# Altium PCB LEDBoard.PcbDoc
Units mil, origin at the board's own origin, x right, y up, seen from the top; angles counter-clockwise.
Board outline 3149.61 x 3149.61 mil, 4 copper layers (Top Layer, PWR, GND, Bottom Layer), stack 23.756 mil thick; 65 components, 34 nets, 164 pads, 125 vias.
Unrouted connection lines stored in the file: 4.
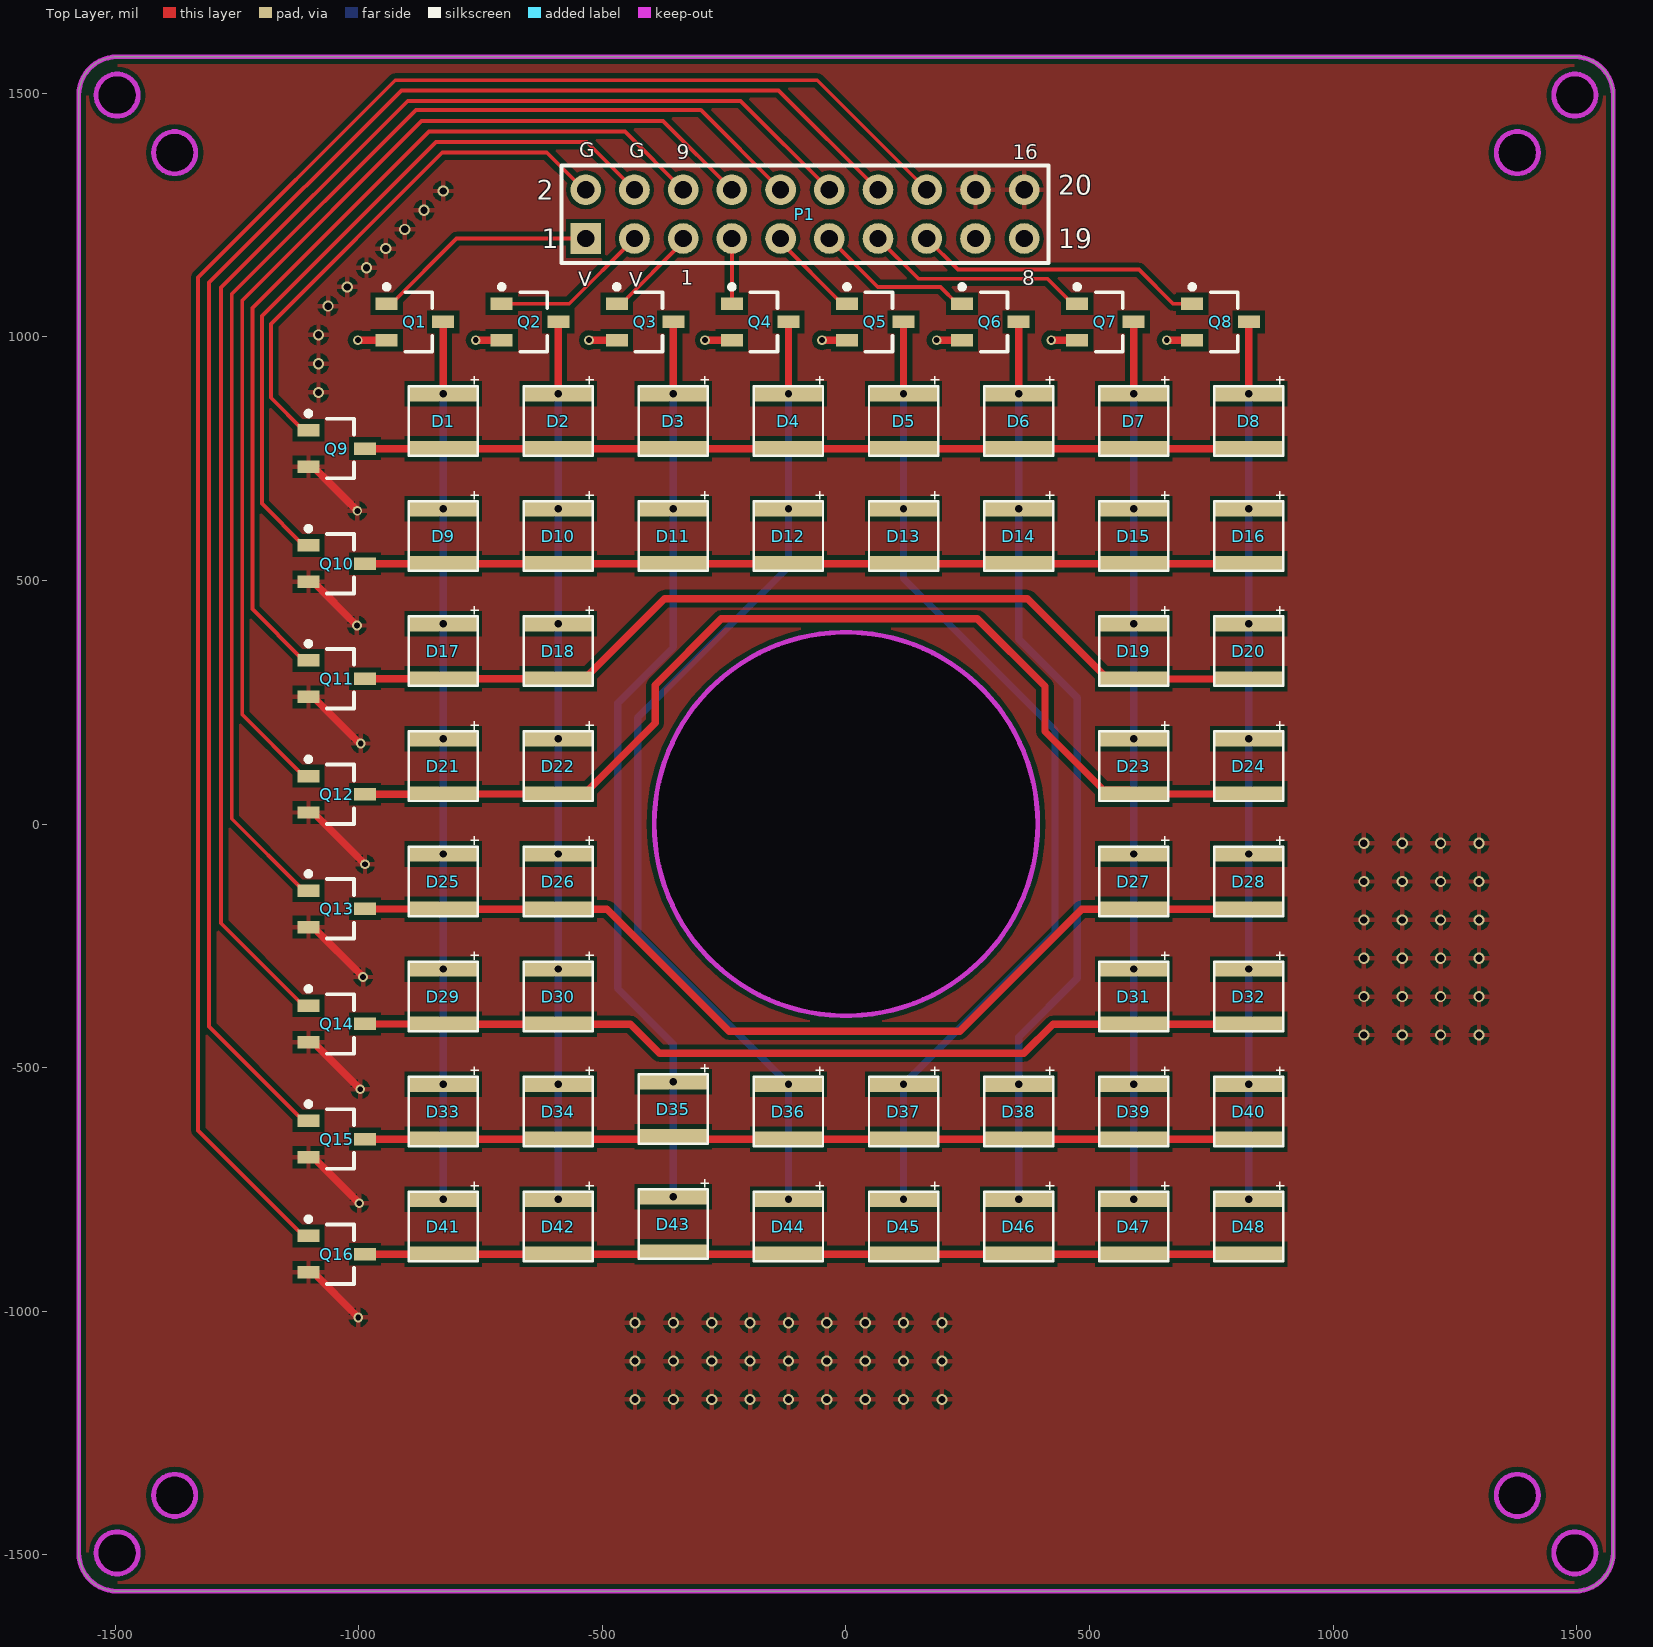
[diagram p0: Top Layer view]
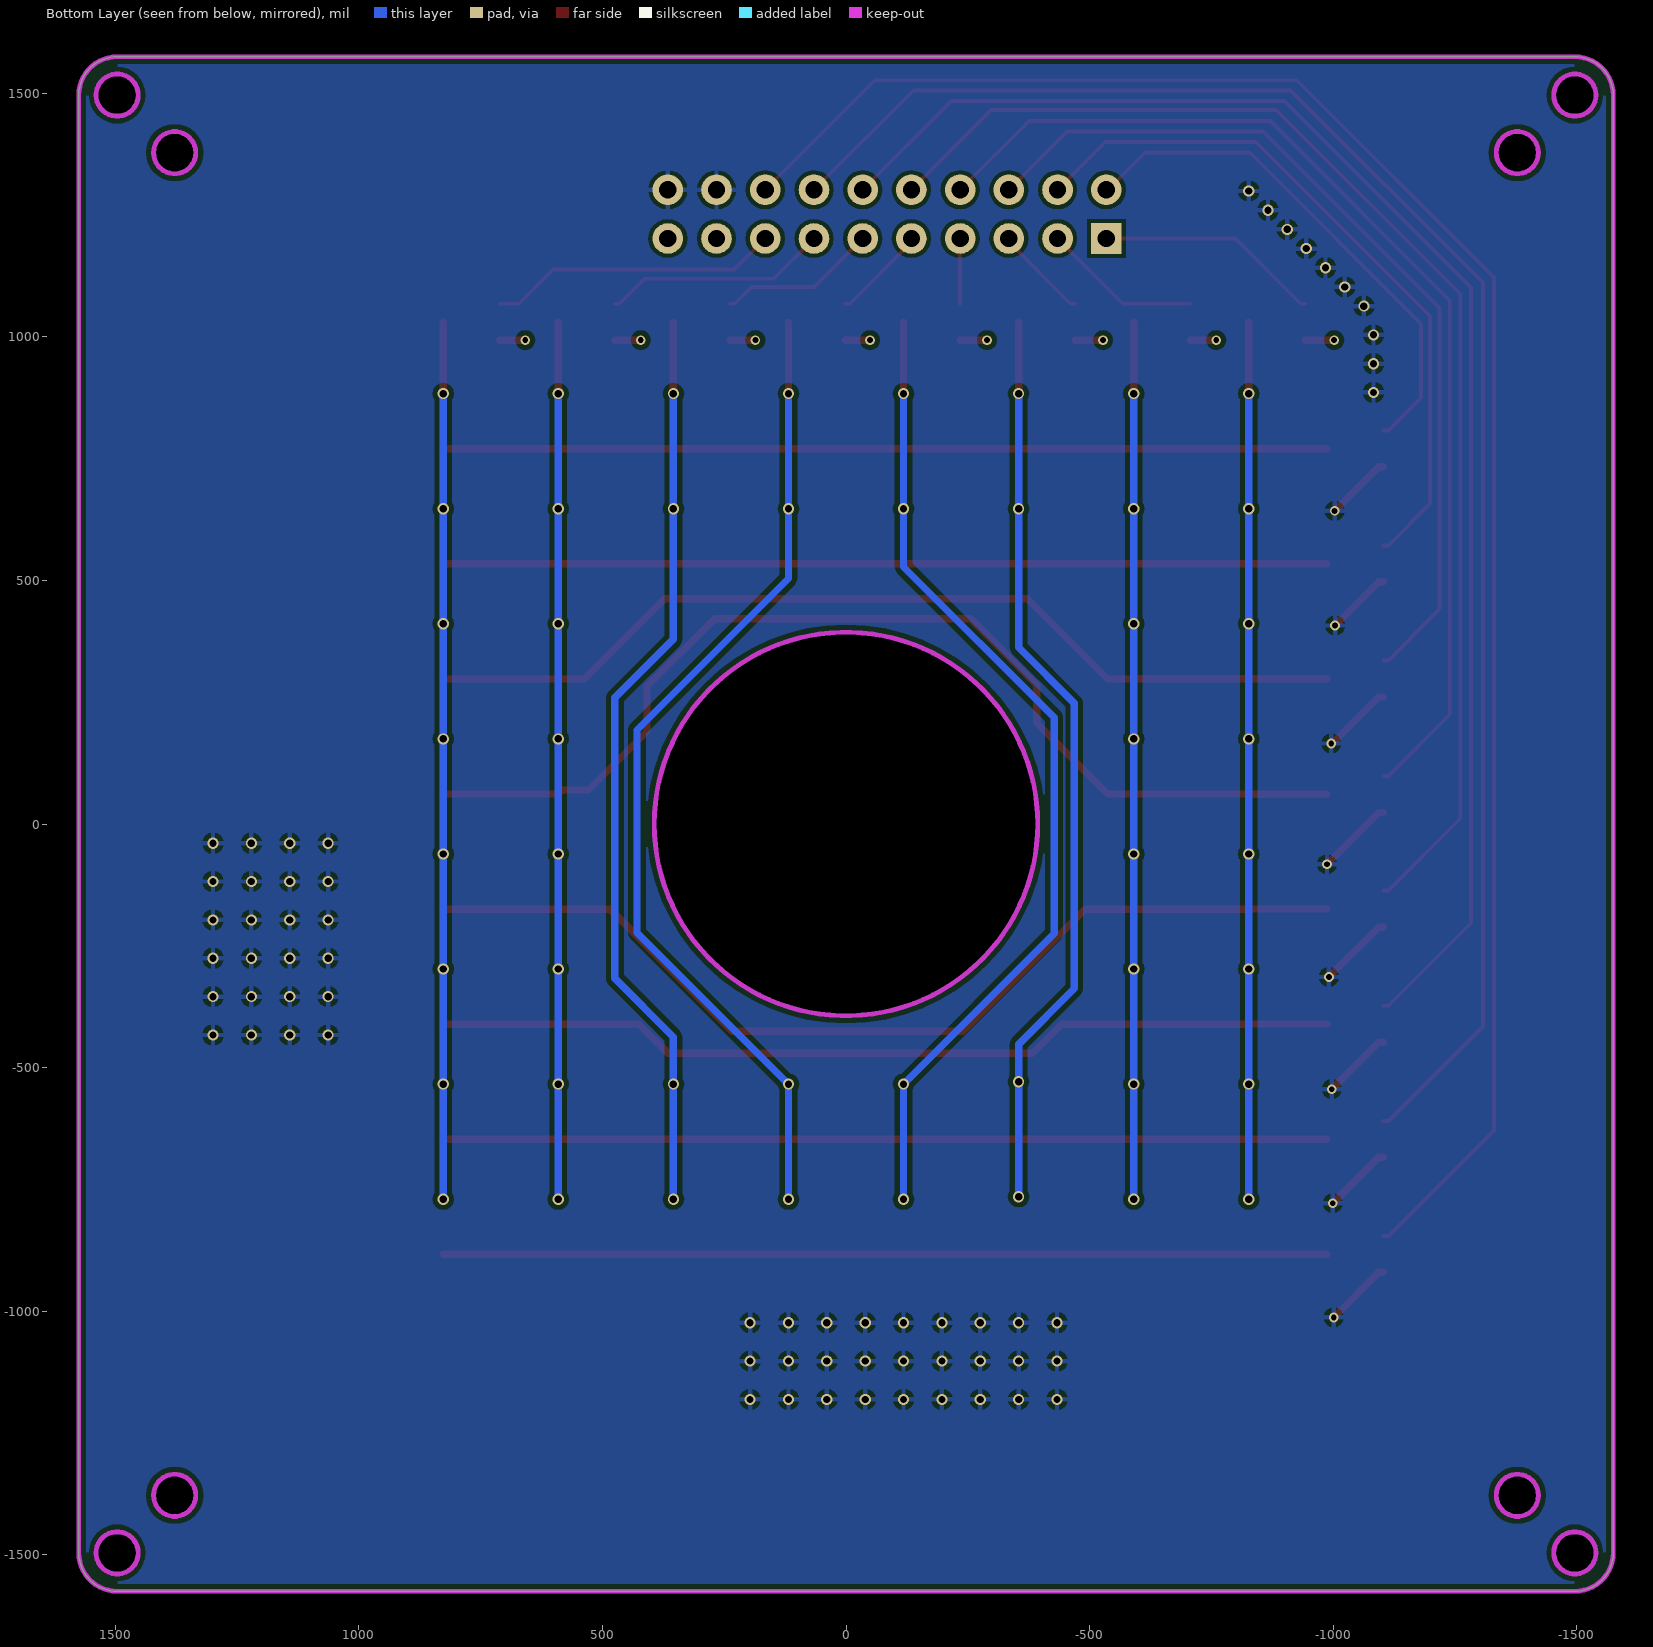
[diagram p1: Bottom Layer view, seen from below]
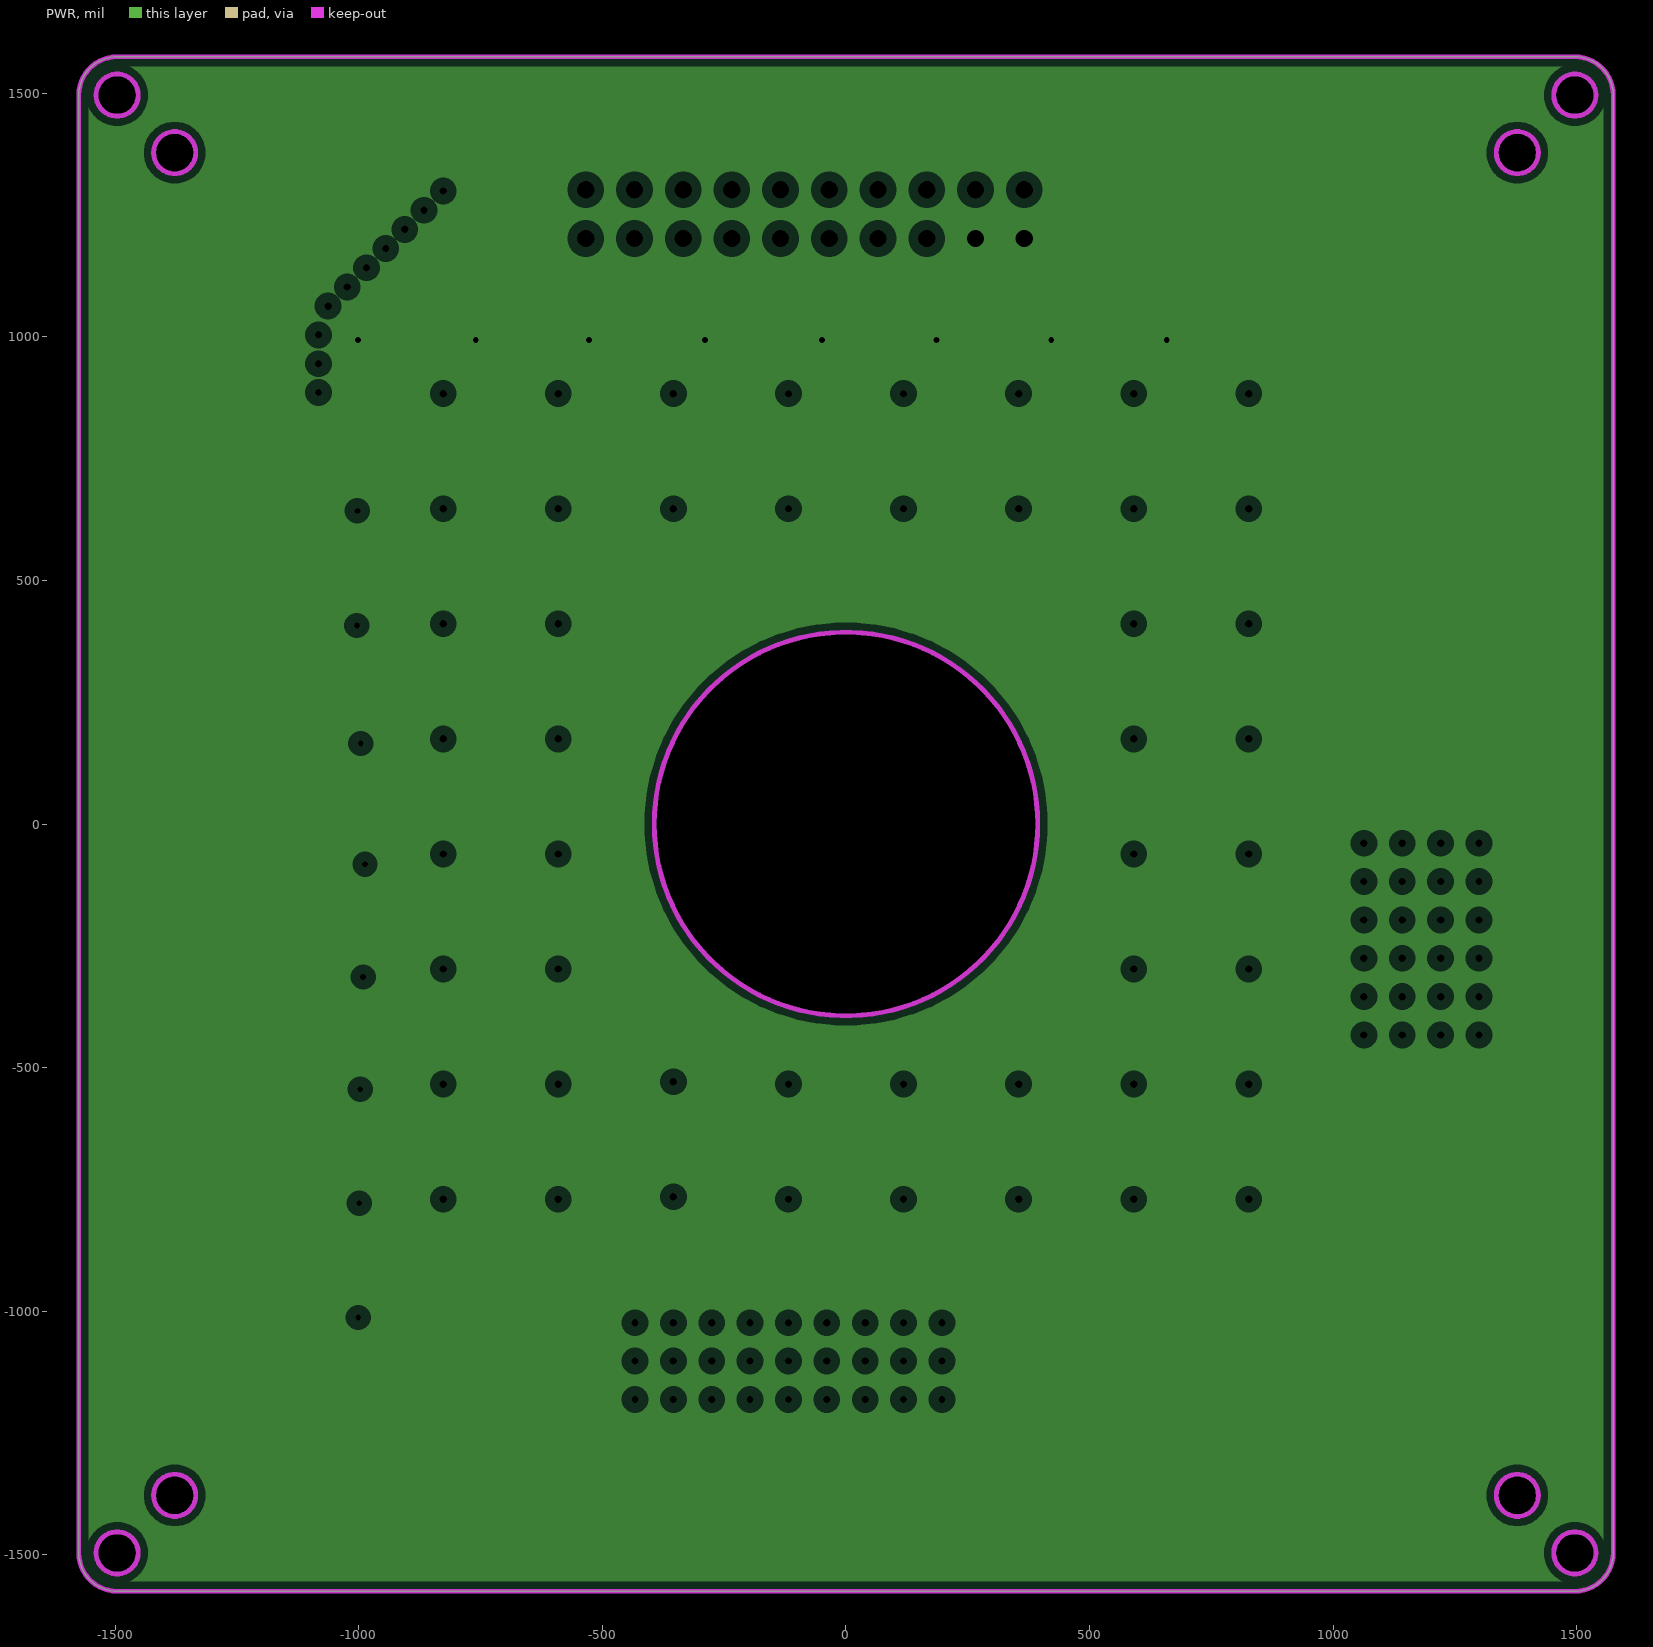
[diagram p2: PWR, clearances drawn from the general rule]
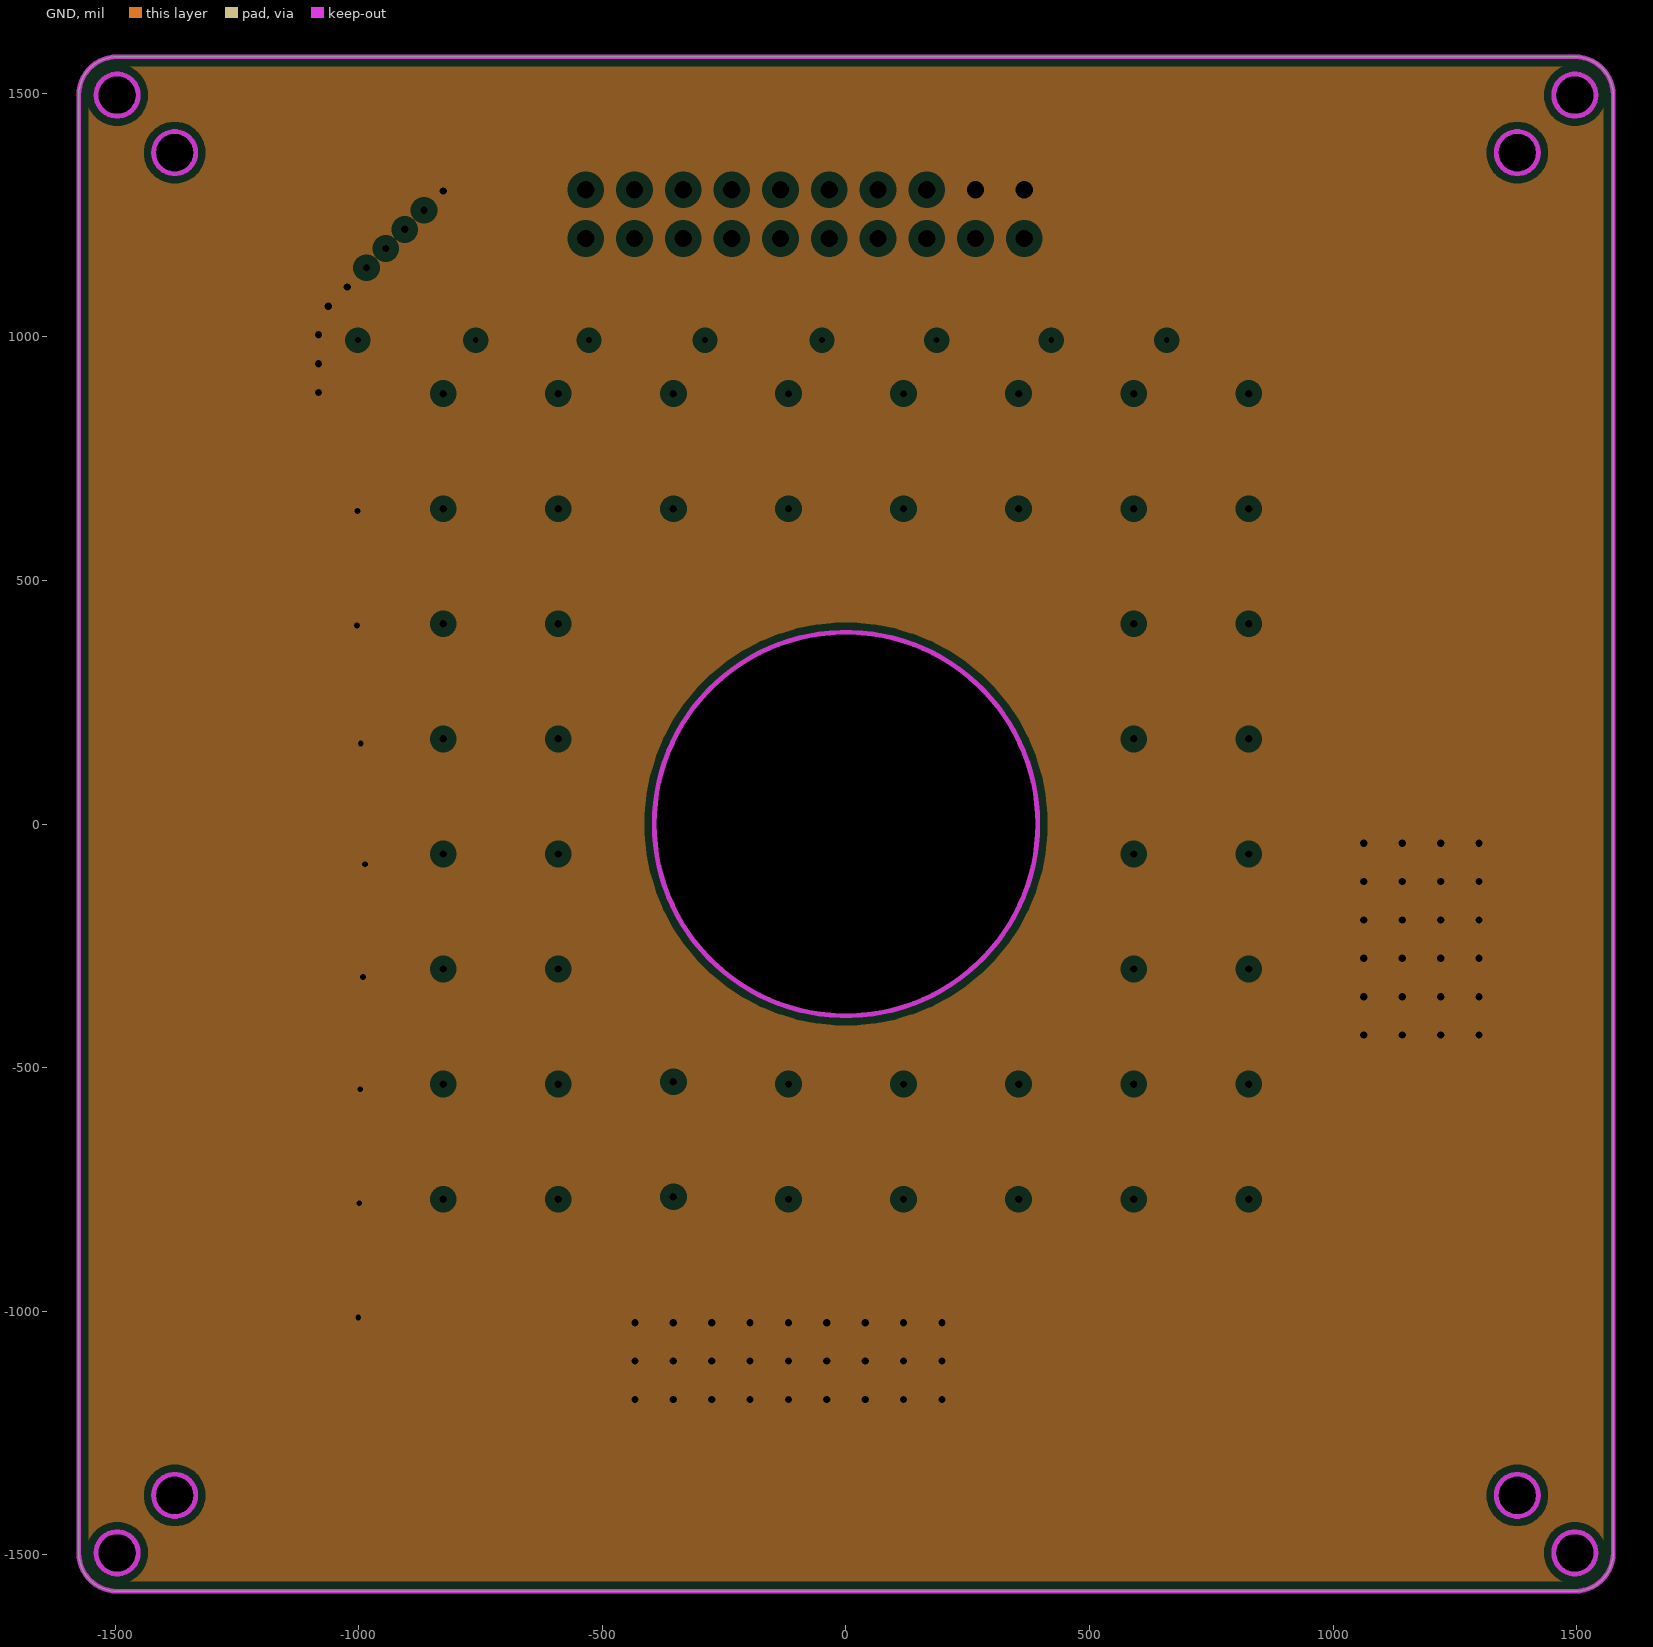
[diagram p3: GND, clearances drawn from the general rule]

## Layer stack, top to bottom
Top Solder: solder mask 0.4, Solder Resist, Dk 3.5
Top Layer: signal copper 1.4
Dielectric 2: prepreg 2.8, PP-006, Dk 4.1
PWR: plane copper 1.378, net LED_V
Dielectric 1: dielectric 12.6, FR-4, Dk 4.8
GND: plane copper 1.378, net LED_G
Dielectric 3: prepreg 2.8, PP-006, Dk 4.1
Bottom Layer: signal copper 1.4
Bottom Solder: solder mask 0.4, Solder Resist, Dk 3.5

## Board outline
-1574.8,-1496.06 ccw(c-1496.06,-1496.06) -1496.06,-1574.8 1496.06,-1574.8 ccw(c1496.06,-1496.06) 1574.8,-1496.06 1574.8,1496.06 ccw(c1496.06,1496.06) 1496.06,1574.8 -1496.06,1574.8 ccw(c-1496.06,1496.06) -1574.8,1496.06
cut-out: 1334.65,1377.95 ccw(c1377.95,1377.95) 1377.95,1334.65 ccw(c1377.95,1377.95) 1421.26,1377.95 ccw(c1377.95,1377.95) 1377.95,1421.26 ccw(c1377.95,1377.95)
cut-out: 1334.65,-1377.95 ccw(c1377.95,-1377.95) 1377.95,-1421.26 ccw(c1377.95,-1377.95) 1421.26,-1377.95 ccw(c1377.95,-1377.95) 1377.95,-1334.65 ccw(c1377.95,-1377.95)
cut-out: -1421.26,-1377.95 ccw(c-1377.95,-1377.95) -1377.95,-1421.26 ccw(c-1377.95,-1377.95) -1334.65,-1377.95 ccw(c-1377.95,-1377.95) -1377.95,-1334.65 ccw(c-1377.95,-1377.95)
cut-out: -1377.95,1334.65 cw(c-1377.95,1377.95) -1421.26,1377.95 cw(c-1377.95,1377.95) -1377.95,1421.26 cw(c-1377.95,1377.95) -1334.65,1377.95 cw(c-1377.95,1377.95)
cut-out: -1539.37,-1496.06 ccw(c-1496.06,-1496.06) -1496.06,-1539.37 ccw(c-1496.06,-1496.06) -1452.76,-1496.06 ccw(c-1496.06,-1496.06) -1496.06,-1452.76 ccw(c-1496.06,-1496.06)
cut-out: 1452.76,-1496.06 ccw(c1496.06,-1496.06) 1496.06,-1539.37 ccw(c1496.06,-1496.06) 1539.37,-1496.06 ccw(c1496.06,-1496.06) 1496.06,-1452.76 ccw(c1496.06,-1496.06)
cut-out: 1452.76,1496.06 ccw(c1496.06,1496.06) 1496.06,1452.76 ccw(c1496.06,1496.06) 1539.37,1496.06 ccw(c1496.06,1496.06) 1496.06,1539.37 ccw(c1496.06,1496.06)
cut-out: -1496.06,1452.76 cw(c-1496.06,1496.06) -1539.37,1496.06 cw(c-1496.06,1496.06) -1496.06,1539.37 cw(c-1496.06,1496.06) -1452.76,1496.06 cw(c-1496.06,1496.06)
cut-out: -393.7,0 ccw(c0,0) 0,-393.7 ccw(c0,0) 393.7,0 ccw(c0,0) 0,393.7 ccw(c0,0)

## Design rules (kind name [scope] priority, off if disabled: settings)
Clearance [All] p1: gap=6 ignorepadtopadclearanceinfootprint=FALSE
ComponentClearance [All] p1: gap=0 collisioncheckmode=3 verticalgap=0 showdistances=FALSE
MinimumSolderMaskSliver [All] p1: minsoldermaskwidth=4
PlaneClearance [All] p1: clearance=20
PlaneConnect [All] p1: pad.planeconnectstyle=Relief pad.reliefexpansion=20 pad.reliefentries=4 pad.reliefconductorwidth=10 pad.reliefairgap=10 via.planeconnectstyle=Direct via.reliefexpansion=20 via.reliefentries=4 via.reliefconductorwidth=10 via.reliefairgap=10
PolygonConnect [All] p1: connectstyle=Relief reliefconductorwidth=10 reliefentries=4 polygonreliefangle="90 Angle" airgapwidth=10
RoutingVias [All] p1: holewidth=12 width=20 viastyle="Through Hole" minholewidth=12 minwidth=20 maxholewidth=12 maxwidth=20
SilkToSilkClearance [All] p1: silktosilkclearance=0
SilkToSolderMaskClearance [IsPad] p1: minsilkscreentomaskgap=0 clearancetoexposedcopper=TRUE
SolderMaskExpansion [All] p1: expansion=4 istentingtop=FALSE
Width [All] p1: maxlimit=50 minlimit=6 preferedwidth=8
24 further rules are at their usual default settings.

## Components (designator, comment, footprint, x,y, rotation, side; value= is the part's Value field where it differs from the comment)
D1 "3535_LED" 3535_LED -826.77,826.77 r270 top
D2 "3535_LED" 3535_LED -590.55,826.77 r270 top
D3 "3535_LED" 3535_LED -354.33,826.77 r270 top
D4 "3535_LED" 3535_LED -118.11,826.77 r270 top
D5 "3535_LED" 3535_LED 118.11,826.77 r270 top
D6 "3535_LED" 3535_LED 354.33,826.77 r270 top
D7 "3535_LED" 3535_LED 590.55,826.77 r270 top
D8 "3535_LED" 3535_LED 826.77,826.77 r270 top
D9 "3535_LED" 3535_LED -826.77,590.55 r270 top
D10 "3535_LED" 3535_LED -590.55,590.55 r270 top
D11 "3535_LED" 3535_LED -354.33,590.55 r270 top
D12 "3535_LED" 3535_LED -118.11,590.55 r270 top
D13 "3535_LED" 3535_LED 118.11,590.55 r270 top
D14 "3535_LED" 3535_LED 354.33,590.55 r270 top
D15 "3535_LED" 3535_LED 590.55,590.55 r270 top
D16 "3535_LED" 3535_LED 826.77,590.55 r270 top
D17 "3535_LED" 3535_LED -826.77,354.33 r270 top
D18 "3535_LED" 3535_LED -590.55,354.33 r270 top
D19 "3535_LED" 3535_LED 590.55,354.33 r270 top
D20 "3535_LED" 3535_LED 826.77,354.33 r270 top
D21 "3535_LED" 3535_LED -826.77,118.11 r270 top
D22 "3535_LED" 3535_LED -590.55,118.11 r270 top
D23 "3535_LED" 3535_LED 590.55,118.11 r270 top
D24 "3535_LED" 3535_LED 826.77,118.11 r270 top
D25 "3535_LED" 3535_LED -826.77,-118.11 r270 top
D26 "3535_LED" 3535_LED -590.55,-118.11 r270 top
D27 "3535_LED" 3535_LED 590.55,-118.11 r270 top
D28 "3535_LED" 3535_LED 826.77,-118.11 r270 top
D29 "3535_LED" 3535_LED -826.77,-354.33 r270 top
D30 "3535_LED" 3535_LED -590.55,-354.33 r270 top
D31 "3535_LED" 3535_LED 590.55,-354.33 r270 top
D32 "3535_LED" 3535_LED 826.77,-354.33 r270 top
D33 "3535_LED" 3535_LED -826.77,-590.55 r270 top
D34 "3535_LED" 3535_LED -590.55,-590.55 r270 top
D35 "3535_LED" 3535_LED -354.33,-585.55 r270 top
D36 "3535_LED" 3535_LED -118.11,-590.55 r270 top
D37 "3535_LED" 3535_LED 118.11,-590.55 r270 top
D38 "3535_LED" 3535_LED 354.33,-590.55 r270 top
D39 "3535_LED" 3535_LED 590.55,-590.55 r270 top
D40 "3535_LED" 3535_LED 826.77,-590.55 r270 top
D41 "3535_LED" 3535_LED -826.77,-826.77 r270 top
D42 "3535_LED" 3535_LED -590.55,-826.77 r270 top
D43 "3535_LED" 3535_LED -354.33,-821.77 r270 top
D44 "3535_LED" 3535_LED -118.11,-826.77 r270 top
D45 "3535_LED" 3535_LED 118.11,-826.77 r270 top
D46 "3535_LED" 3535_LED 354.33,-826.77 r270 top
D47 "3535_LED" 3535_LED 590.55,-826.77 r270 top
D48 "3535_LED" 3535_LED 826.77,-826.77 r270 top
P1 "Header 10X2" HDR2.54-LI-2x10P -84.25,1251.77 r0 top
Q1 "AO3401A P道沟 X13A15 SOT-23" LC-SOT-23-3L -884.84,1030.51 r180 top
Q2 "AO3401A P道沟 X13A15 SOT-23" LC-SOT-23-3L -648.62,1030.51 r180 top
Q3 "AO3401A P道沟 X13A15 SOT-23" LC-SOT-23-3L -412.4,1030.51 r180 top
Q4 "AO3401A P道沟 X13A15 SOT-23" LC-SOT-23-3L -176.18,1030.51 r180 top
Q5 "AO3401A P道沟 X13A15 SOT-23" LC-SOT-23-3L 60.04,1030.51 r180 top
Q6 "AO3401A P道沟 X13A15 SOT-23" LC-SOT-23-3L 296.26,1030.51 r180 top
Q7 "AO3401A P道沟 X13A15 SOT-23" LC-SOT-23-3L 532.48,1030.51 r180 top
Q8 "AO3401A P道沟 X13A15 SOT-23" LC-SOT-23-3L 768.7,1030.51 r180 top
Q9 "AO3400A N道沟 X0YV1T SOT-23" SOT-23-3L -1045.27,770.67 r180 top
Q10 "AO3400A N道沟 X0YV1T SOT-23" SOT-23-3L -1045.27,534.45 r180 top
Q11 "AO3400A N道沟 X0YV1T SOT-23" SOT-23-3L -1045.27,298.23 r180 top
Q12 "AO3400A N道沟 X0YV1T SOT-23" SOT-23-3L -1045.27,61.02 r180 top
Q13 "AO3400A N道沟 X0YV1T SOT-23" SOT-23-3L -1045.27,-174.21 r180 top
Q14 "AO3400A N道沟 X0YV1T SOT-23" SOT-23-3L -1045.27,-410.43 r180 top
Q15 "AO3400A N道沟 X0YV1T SOT-23" SOT-23-3L -1045.27,-646.65 r180 top
Q16 "AO3400A N道沟 X0YV1T SOT-23" SOT-23-3L -1045.27,-882.87 r180 top

## Footprints (in the part's own frame and the unit in brackets; to place one, negate y for a bottom-side part, rotate by r counter-clockwise, add the part's x,y. Pads: shape width x height; smd on the part's side, far side on the other; paste and mask are expansions set on the pad)
3535_LED [mm]
  rect 0.8x3.5 smd: 1(-1.438,0) 2(1.438,0)
  silkscreen extent -2.35,-1.8 1.8,1.85, body extent -1.73,-1.73 1.73,1.73, height 2.03
HDR2.54-LI-2x10P [mm] "双排排针，10x2脚"
  rect 1.6x1.6 hole 0.9: 1(-11.43,-1.27)
  round 1.6 hole 0.9: 2(-11.43,1.27) 3(-8.89,-1.27) 4(-8.89,1.27) 5(-6.35,-1.27) 6(-6.35,1.27) 7(-3.81,-1.27) 8(-3.81,1.27) 9(-1.27,-1.27) 10(-1.27,1.27) 11(1.27,-1.27) 12(1.27,1.27) 13(3.81,-1.27) 14(3.81,1.27) 15(6.35,-1.27) 16(6.35,1.27) 17(8.89,-1.27) 18(8.89,1.27) 19(11.43,-1.27) 20(11.43,1.27)
  silkscreen extent -12.7,-2.54 12.7,2.54, body extent -12.7,-2.54 12.7,2.54, height 3
LC-SOT-23-3L [mm] "http://www.aosmd.com/res/packaging_information/SOT-23-3L.pdf"
  rect 1.15x0.65 smd: 1(1.475,-0.95) 2(1.475,0.95) 3(-1.475,0)
  silkscreen extent -0.9,-1.95 1.6,1.55, body extent -0.9,-1.55 0.9,1.55, height 1.25
SOT-23-3L [mm] "http://www.aosmd.com/res/packaging_information/SOT-23-3L.pdf"
  rect 1.15x0.65 smd: 1(1.475,-0.95) 2(1.475,0.95) 3(-1.475,0)
  silkscreen extent -0.9,-1.95 1.6,1.55, body extent -0.9,-1.55 0.9,1.55, height 1.25

## Part data
P1: "Header, 10-Pin, Dual row", LatestRevisionDate=17-Jul-2002, LatestRevisionNote="Re-released for DXP Platform.", Publisher="Altium Limited"
Q1 Q2 Q3 Q4 Q5 Q6 Q7 Q8: "MOS(场效应管)", Package=SOT-23, SuppliersPartNumber=C15127, ComponentLink1Description=供应商链接, ComponentLink1URL=http://www.szlcsc.com/product/details_15801.html, Supplier=LC
Q9 Q10 Q11 Q12 Q13 Q14 Q15 Q16: "MOS(场效应管)", Package=SOT-23, SuppliersPartNumber=C20917, ComponentLink1Description=供应商链接, ComponentLink1URL=http://www.szlcsc.com/product/details_21629.html, Supplier=LC

## Via types
v1: diameter 23, hole 15, Top Layer to Bottom Layer, 109 vias
v2: diameter 20, hole 12, Top Layer to Bottom Layer, 16 vias

## Nets (pads, with @x,y where several pads share a name; then routed paths per layer and width w, separated by ;. In a path a pad name is that pad's centre, name@x,y a point inside that pad or via, vN(x,y) a via of type N, cw(c..) or ccw(c..) an arc to the next point about the centre after c; other vN are vias at no path point)
CON1: P1.1 Q1.1 | length 464.1
  Top Layer w8: Q1.1 -933.07,1067.91 -799.21,1201.77 P1.1
  other v1: -984.25,1141.73 -944.88,1181.1
CON2: P1.3 Q2.1 | length 327.9
  Top Layer w8: Q2.1 -568.11,1067.91 P1.3
CON3: P1.5 Q3.1 | length 196
  Top Layer w8: Q3.1 -460.63,1067.91 -334.25,1194.29 P1.5
CON4: P1.7 Q4.1 | length 133.9
  Top Layer w8: Q4.1 P1.7
CON5: P1.9 Q5.1 | length 196
  Top Layer w8: P1.9 -134.25,1194.29 -7.87,1067.91 Q5.1
CON6: P1.11 Q6.1 | length 327.9
  Top Layer w8: P1.11 65.16,1102.36 193.9,1102.36 228.35,1067.91 Q6.1
CON7: P1.13 Q7.1 | length 464.1
  Top Layer w8: P1.13 148.43,1119.09 413.39,1119.09 464.57,1067.91 Q7.1
CON8: P1.15 Q8.1 | length 600.3
  Top Layer w8: P1.15 229.72,1137.8 601.38,1137.8 671.26,1067.91 Q8.1
CON9: P1.2 Q9.1 | length 1079
  Top Layer w8: Q9.1 -1113.19,808.07 -1180.12,875 -1180.12,1026.57 -828.74,1377.95 -614.17,1377.95 -537.99,1301.77 P1.2
CON10: P1.4 Q10.1 | length 1468.9
  Top Layer w8: Q10.1 -1113.19,571.85 -1198.82,657.48 -1198.82,1042.32 -841.54,1399.61 -532.09,1399.61 P1.4
  other v1: -905.51,1220.47 -866.14,1259.84
CON11: P1.6 Q11.1 | length 1860.7
  Top Layer w8: Q11.1 -1113.19,335.63 -1218.5,440.95 -1218.5,1059.06 -856.3,1421.26 -453.74,1421.26 P1.6
CON12: P1.8 Q12.1 | length 2254.3
  Top Layer w8: Q12.1 -1113.19,98.43 -1239.17,224.41 -1239.17,1074.8 -871.06,1442.91 -375.39,1442.91 P1.8
CON13: P1.10 Q13.1 | length 2646.4
  Top Layer w8: Q13.1 -1113.19,-136.81 -1260.83,10.83 -1260.83,1087.6 -882.87,1465.55 -298.03,1465.55 P1.10
CON14: P1.12 Q14.1 | length 3036.8
  Top Layer w8: Q14.1 -1113.19,-373.03 -1282.48,-203.74 -1282.48,1101.38 -899.61,1484.25 -216.73,1484.25 P1.12
CON15: P1.14 Q15.1 | length 3431.5
  Top Layer w8: Q15.1 -1113.19,-609.25 -1307.09,-415.35 -1307.09,1111.22 -912.4,1505.91 -138.39,1505.91 P1.14
CON16: P1.16 Q16.1 | length 3823.2
  Top Layer w8: Q16.1 -1113.19,-845.47 -1329.72,-628.94 -1329.72,1122.05 -925.2,1526.57 -59.06,1526.57 P1.16
LED_G: P1.18 P1.20 Q9.2 Q10.2 Q11.2 Q12.2 Q13.2 Q14.2 Q15.2 Q16.2 | length 1166.4
  Top Layer w15: Q16.2 -1093.5,-920.28 v2(-1000.98,-1012.8) ; Q15.2 -1093.5,-684.05 v2(-999.02,-778.54) ; Q14.2 -1093.5,-447.83 v2(-997.05,-544.29) ; Q13.2 -1093.5,-211.61 v2(-991.14,-313.98) ; Q12.2 -1093.5,23.62 v2(-987.2,-82.68) ; Q11.2 -1093.5,260.83 -998.03,165.35 v2(-996.06,165.35) ; Q10.2 -1093.5,497.05 v2(-1003.94,407.48) ; Q9.2 -1093.5,733.27 v2(-1002.95,642.72)
  other v1: -433.07,-1181.1 -354.33,-1181.1 -275.59,-1181.1 -196.85,-1181.1 -118.11,-1181.1 -39.37,-1181.1 39.37,-1181.1 118.11,-1181.1 196.85,-1181.1 -433.07,-1102.36 -354.33,-1102.36 -275.59,-1102.36 -196.85,-1102.36 -118.11,-1102.36 -39.37,-1102.36 39.37,-1102.36 118.11,-1102.36 196.85,-1102.36 -433.07,-1023.62 -354.33,-1023.62 -275.59,-1023.62 -196.85,-1023.62 -118.11,-1023.62 -39.37,-1023.62 39.37,-1023.62 118.11,-1023.62 196.85,-1023.62 1062.99,-433.07 1141.73,-433.07 1220.47,-433.07 1299.21,-433.07 1062.99,-354.33 1141.73,-354.33 1220.47,-354.33 1299.21,-354.33 1062.99,-275.59 1141.73,-275.59 1220.47,-275.59 1299.21,-275.59 1062.99,-196.85 1141.73,-196.85 1220.47,-196.85 1299.21,-196.85 1062.99,-118.11 1141.73,-118.11 1220.47,-118.11 1299.21,-118.11 1062.99,-39.37 1141.73,-39.37 1220.47,-39.37 1299.21,-39.37 -1082.68,885.83 -1082.68,944.88 -1082.68,1003.94 -1062.99,1062.99 -1023.62,1102.36 -826.77,1299.21
LED_V: P1.17 P1.19 Q1.2 Q2.2 Q3.2 Q4.2 Q5.2 Q6.2 Q7.2 Q8.2 | length 433.1
  Top Layer w15: v2(-1001.97,993.11) Q1.2 ; v2(-759.84,993.11) Q2.2 ; v2(-527.56,993.11) Q3.2 ; v2(-289.37,993.11) Q4.2 ; v2(-49.21,993.11) Q5.2 ; v2(186.02,993.11) Q6.2 ; v2(421.26,993.11) Q7.2 ; v2(658.46,993.11) Q8.2
NetD1_1: D1.1 D9.1 D17.1 D21.1 D25.1 D29.1 D33.1 D41.1 Q1.3 | length 1800.7
  Top Layer w15: v1(-826.77,883.37) Q1.3
  Bottom Layer w15: v1(-826.77,-770.18) v1(-826.77,-533.96) v1(-826.77,-297.74) v1(-826.77,-61.52) v1(-826.77,174.7) v1(-826.77,410.93) v1(-826.77,647.15) v1(-826.77,883.37)
NetD1_2: D1.2 D2.2 D3.2 D4.2 D5.2 D6.2 D7.2 D8.2 Q9.3 | length 1814.2
  Top Layer w15: Q9.3 -986.96,770.42 -827.02,770.42 D1.2 D2.2 D3.2 D4.2 D5.2 D6.2 D7.2 D8.2
NetD2_1: D2.1 D10.1 D18.1 D22.1 D26.1 D30.1 D34.1 D42.1 Q2.3 | length 1800.7
  Top Layer w15: v1(-590.55,883.37) Q2.3
  Bottom Layer w15: v1(-590.55,-770.18) v1(-590.55,-533.96) v1(-590.55,-297.74) v1(-590.55,-61.52) v1(-590.55,174.7) v1(-590.55,410.93) v1(-590.55,647.15) v1(-590.55,883.37)
NetD3_1: D3.1 D11.1 D35.1 D43.1 Q3.3 | length 1890.3
  Top Layer w15: v1(-354.33,883.37) Q3.3
  Bottom Layer w15: v1(-354.33,-765.18) v1(-354.33,-528.96) -354.33,-451.77 -468.5,-337.6 -468.5,248.03 -354.33,362.2 v1(-354.33,647.15) v1(-354.33,883.37)
NetD4_1: D4.1 D12.1 D36.1 D44.1 Q4.3 | length 2056.7
  Top Layer w15: v1(-118.11,883.37) Q4.3
  Bottom Layer w15: v1(-118.11,-770.18) v1(-118.11,-533.96) -427.17,-224.9 -427.17,218.5 -118.11,527.56 v1(-118.11,647.15) v1(-118.11,883.37)
NetD5_1: D5.1 D13.1 D37.1 D45.1 Q5.3 | length 2058.3
  Top Layer w15: v1(118.11,883.37) Q5.3
  Bottom Layer w15: v1(118.11,-770.18) v1(118.11,-533.96) 429.13,-222.93 429.13,192.91 118.11,503.94 v1(118.11,647.15) v1(118.11,883.37)
NetD6_1: D6.1 D14.1 D38.1 D46.1 Q6.3 | length 1900.2
  Top Layer w15: v1(354.33,883.37) Q6.3
  Bottom Layer w15: v1(354.33,-770.18) v1(354.33,-533.96) 354.33,-437.01 474.41,-316.93 474.41,258.86 354.33,378.94 v1(354.33,647.15) v1(354.33,883.37)
NetD7_1: D7.1 D15.1 D19.1 D23.1 D27.1 D31.1 D39.1 D47.1 Q7.3 | length 1800.7
  Top Layer w15: v1(590.55,883.37) Q7.3
  Bottom Layer w15: v1(590.55,-770.18) v1(590.55,-533.96) v1(590.55,-297.74) v1(590.55,-61.52) v1(590.55,174.7) v1(590.55,410.93) v1(590.55,647.15) v1(590.55,883.37)
NetD8_1: D8.1 D16.1 D20.1 D24.1 D28.1 D32.1 D40.1 D48.1 Q8.3 | length 1800.7
  Top Layer w15: v1(826.77,883.37) Q8.3
  Bottom Layer w15: v1(826.77,-770.18) v1(826.77,-533.96) v1(826.77,-297.74) v1(826.77,-61.52) v1(826.77,174.7) v1(826.77,410.93) v1(826.77,647.15) v1(826.77,883.37)
NetD9_2: D9.2 D10.2 D11.2 D12.2 D13.2 D14.2 D15.2 D16.2 Q10.3 | length 1814.2
  Top Layer w15: Q10.3 -986.96,534.2 826.53,534.2 D16.2
NetD17_2: D17.2 D18.2 D19.2 D20.2 Q11.3 | length 1950.8
  Top Layer w15: Q11.3 -986.96,297.98 -826.77,297.98 -590.8,297.98 D18.2 -537.4,297.74 -372.54,462.6 372.54,462.6 537.4,297.74 D19.2 D20.2
NetD21_2: D21.2 D22.2 D23.2 D24.2 Q12.3 | length 2212.2
  Top Layer w15: Q12.3 -986.96,61.27 -827.02,61.27 D21.2 D22.2 -537.4,61.52 -391.73,207.18 -391.73,285.43 -255.91,421.26 269.69,421.26 408.46,282.48 408.46,189.96 528.66,69.76 582.3,69.76 D23.2 D24.2
NetD25_2: D25.2 D26.2 D27.2 D28.2 Q13.3 | length 2021.7
  Top Layer w15: Q13.3 -986.96,-174.46 -827.02,-174.46 D25.2 D26.2 -490.65,-174.7 -240.16,-425.2 233.27,-425.2 483.76,-174.7 D27.2 D28.2
NetD29_2: D29.2 D30.2 D31.2 D32.2 Q14.3 | length 1863.5
  Top Layer w15: Q14.3 -986.96,-410.68 -827.02,-410.68 D29.2 D30.2 -442.42,-410.93 -382.87,-470.47 365.16,-470.47 424.7,-410.93 D31.2 D32.2
NetD33_2: D33.2 D34.2 D35.2 D36.2 D37.2 D38.2 D39.2 D40.2 Q15.3 | length 1814.2
  Top Layer w15: Q15.3 -986.96,-646.9 826.53,-646.9 D40.2
NetD41_2: D41.2 D42.2 D43.2 D44.2 D45.2 D46.2 D47.2 D48.2 Q16.3 | length 1814.2
  Top Layer w15: Q16.3 -986.96,-883.12 826.53,-883.12 D48.2

## Polygon pours and split planes (outlines as drawn)
LED_G on Bottom Layer "LED_G_L04_P001" (solid, remove dead copper, pour order 1): -1574.8,1574.8 -1574.8,-1574.8 1574.8,-1574.8 1574.8,1574.8
LED_G on Top Layer "LED_G_L01_P000" (solid, remove dead copper, pour order 0): -1574.8,1574.8 1574.8,1574.8 1574.8,-1574.8 -1574.8,-1574.8
LED_G on GND (split plane): 231 vertices, not listed, extent -1554.71,-1554.71 1554.71,1554.71
LED_V on PWR (split plane): 231 vertices, not listed, extent -1554.71,-1554.71 1554.71,1554.71

## Keep-outs
Keep-Out Layer:
  circle w10: c-1377.95,-1377.95 r43.31
  circle w10: c1377.95,-1377.95 r43.31
  circle w10: c1377.95,1377.95 r43.31
  circle w10: c-1377.95,1377.95 r43.31
  circle w10: c-1496.06,1496.06 r43.31
  circle w10: c1496.06,1496.06 r43.31
  circle w10: c1496.06,-1496.06 r43.31
  circle w10: c-1496.06,-1496.06 r43.31
  circle w10: c0,0 r393.7
  lines w10: -1574.8,-1496.06 ccw(c-1496.06,-1496.06) -1496.06,-1574.8 1496.06,-1574.8 ccw(c1496.06,-1496.06) 1574.8,-1496.06 1574.8,1496.06 ccw(c1496.06,1496.06) 1496.06,1574.8 -1496.06,1574.8 ccw(c-1496.06,1496.06) -1574.8,1496.06 -1574.8,-1496.06

## Silkscreen, mask and mechanical layers (free items; w line width, h text height)
Top Overlay:
  text "G" at -547.15,1368.2 h30
  text "G" at -444.79,1367.22 h30
  text "9" at -347.35,1364.27 h30
  text "16" at 342.61,1364.27 h30
  text "1" at -339.47,1106.39 h30
  text "8" at 361.32,1105.41 h30
  text "V" at -549.38,1104.17 h30
  text "V" at -444.79,1102.46 h30
Mechanical 1:
  circle w10: c-1377.95,1377.95 r43.31
  circle w10: c1377.95,1377.95 r43.31
  circle w10: c-1377.95,-1377.95 r43.31
  circle w10: c1377.95,-1377.95 r43.31
  circle w10: c-1496.06,1496.06 r43.31
  circle w10: c-1496.06,-1496.06 r43.31
  circle w10: c1496.06,-1496.06 r43.31
  circle w10: c1496.06,1496.06 r43.31
  circle w10: c0,0 r393.7
  lines w10: -1574.8,-1496.06 ccw(c-1496.06,-1496.06) -1496.06,-1574.8 1496.06,-1574.8 ccw(c1496.06,-1496.06) 1574.8,-1496.06 1574.8,1496.06 ccw(c1496.06,1496.06) 1496.06,1574.8 -1496.06,1574.8 ccw(c-1496.06,1496.06) -1574.8,1496.06 -1574.8,-1496.06

## Text inside footprints (layer, text, board x,y; h text height)
P1: Top Overlay "19" at 435.75,1181.77 h40; Top Overlay "20" at 435.75,1291.77 h40; Top Overlay "1" at -624.25,1181.77 h40; Top Overlay "2" at -634.25,1281.77 h40